# EAGLE board ss (EAGLE 6.1)
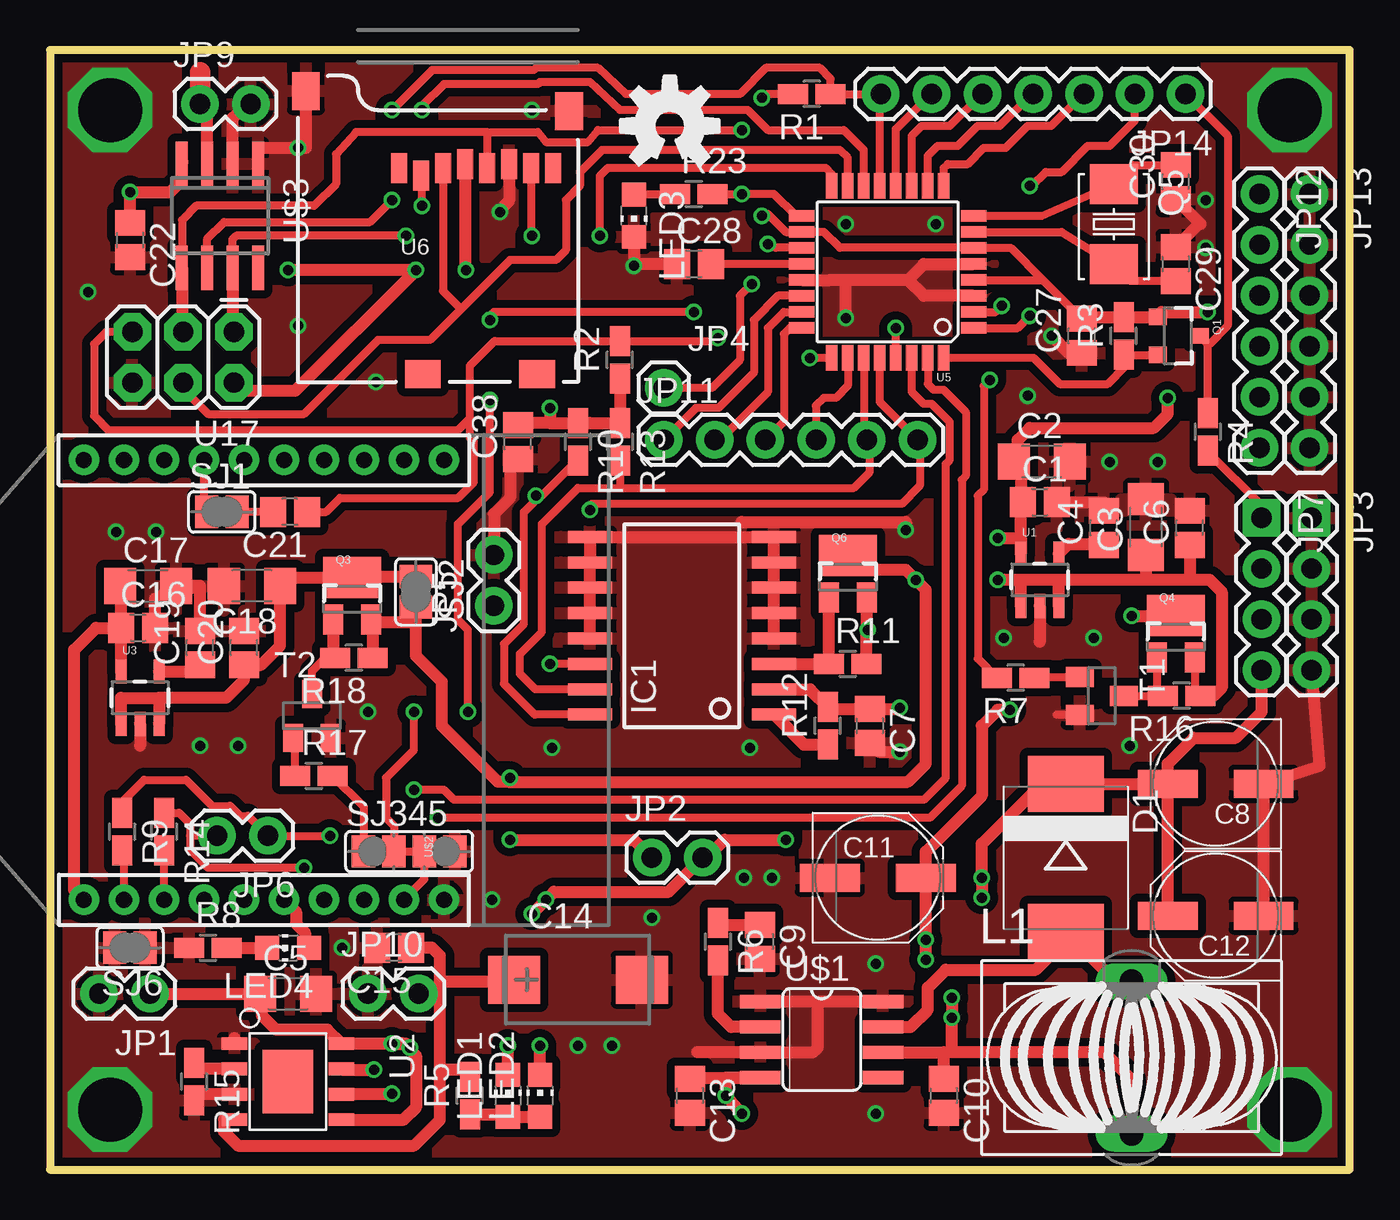
[diagram p0: board, top side]
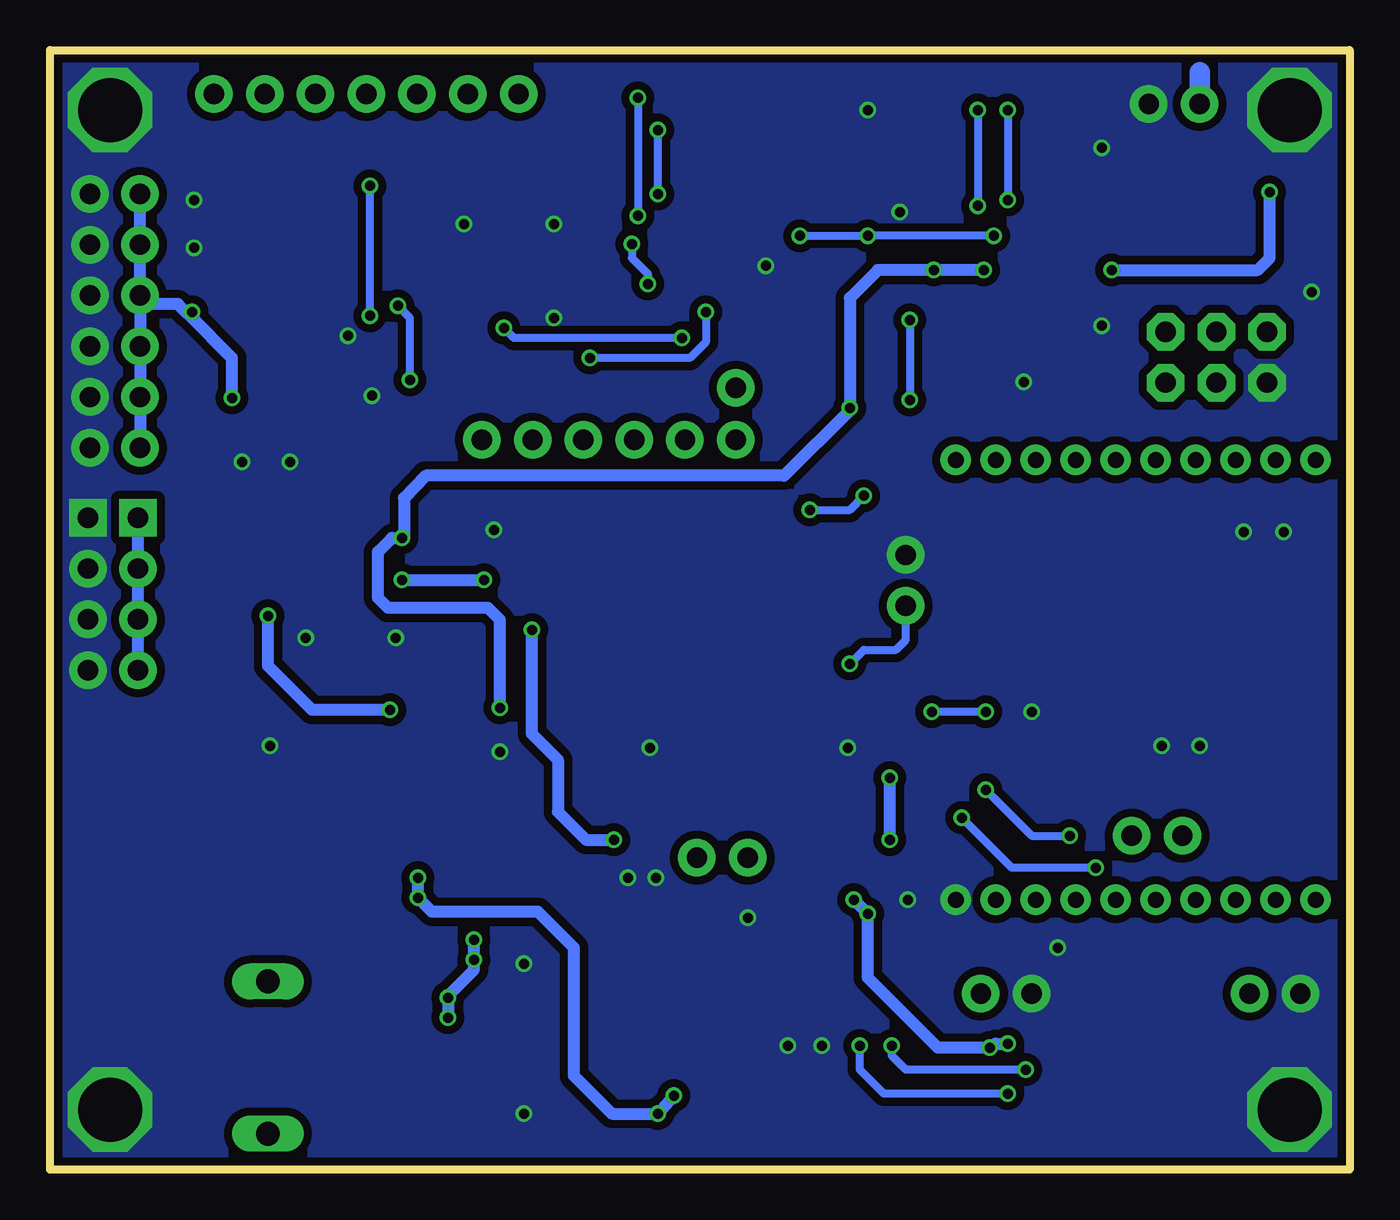
[diagram p1: board, bottom side, seen from below]

Size 65 x 56 mm. Coordinates in mm from the lower left corner, seen from the top.
Outline: 0,0 65,0 65,56 0,56 0,0
Copper layers (1*16): Top 0.035mm / dielectric 1.5mm / Bottom 0.035mm
Design rules: minimum track width 6mil, minimum drill 12mil, track to track 6mil, track to pad 6mil, pad to pad 6mil, via to via 6mil, smd to smd 0mil, copper to edge 10mil, drill to drill 10mil, minimum pad ring 10mil, minimum via ring 6mil, stop-mask expansion 2mil, vias tented up to drill 100mil, thermal gap 10mil
Net classes: 1 vcc: width 0.203 mm

## Footprints (pad centres in the part's own frame; a part is rotated, then mirrored left to right if it is on the bottom)
C0805 = smd 1.3 x 1.5: 1 -0.85,0; 2 0.85,0
C1206 = smd 1.6 x 1.8: 1 -1.4,0; 2 1.4,0
PANASONIC_D = smd 3 x 1.4: + 2.4,0; - -2.4,0
CT7343 = smd 2.6 x 2.4: + -3.2,0; - 3.2,0
SMC = smd 2.8 x 3.8: A 3.7,0; C -3.7,0
SO-16 = smd 0.6 x 2.2: 1 -4.445,-4.6; 2 -3.175,-4.6; 3 -1.905,-4.6; 4 -0.635,-4.6; 5 0.635,-4.6; 6 1.905,-4.6; 7 3.175,-4.6; 8 4.445,-4.6; 9 4.445,4.6; 10 3.175,4.6; 11 1.905,4.6; 12 0.635,4.6; 13 -0.635,4.6; 14 -1.905,4.6; 15 -3.175,4.6; 16 -4.445,4.6
1X02 = drill 1.016 pad 1.88: 1 0,0; 2 2.54,0
1X04 = drill 1.016 pad 1.88 square: 1 0,0 | drill 1.016 pad 1.88: 2 2.54,0; 3 5.08,0; 4 7.62,0
1X01 = drill 1.016 pad 1.88: 1 0,0
1X06 = drill 1.016 pad 1.88: 1 0,0; 2 2.54,0; 3 5.08,0; 4 7.62,0; 5 10.16,0; 6 12.7,0
1X07 = drill 1.016 pad 1.88: 1 0,0; 2 2.54,0; 3 5.08,0; 4 7.62,0; 5 10.16,0; 6 12.7,0; 7 15.24,0
A26GFC = drill 1.194 long: 1 0,3.81; 2 0,-3.81
CHIP-LED0805 = smd 1.2 x 1.2: A 0,-1.05; C 0,1.05
SOT23-3 = smd 0.8 x 0.9: 1 -0.95,-1; 2 0.95,-1; 3 0,1.1
SOT23-3_POWER = smd 1 x 1.5: 1 -0.939,-1.384; 2 0.961,-1.384 | smd 2.9 x 2.05: 3 0.011,0.716
CRYSTAL_5X3.2 = smd 2 x 2.4: P$1 -2,0; P$2 2,0
R0805W = smd 1.5 x 1: 1 -0.94,0; 2 0.94,0
SJ = smd 1.168 x 1.6: 1 -0.762,0; 2 0.762,0
SJ_4P = smd 1.168 x 1.6: 1 0.583,0.803; 2 2.107,0.803; 3 3.631,0.803; 4 5.155,0.803
SOT23 = smd 1 x 1.4: 1 -0.95,-1.1; 2 0.95,-1.1; 3 0,1.1
SOT23-5 = smd 0.55 x 1.2: 1 -0.95,-1.3; 2 0,-1.3; 3 0.95,-1.3; 4 0.95,1.3; 5 -0.95,1.3
SOP8-W/-HEAT = smd 0.635 x 1.27: 1 -1.905,-2.667; 2 -0.635,-2.667; 3 0.635,-2.667; 4 1.905,-2.667; 5 1.905,2.667; 6 0.635,2.667; 7 -0.635,2.667; 8 -1.905,2.667 | smd 3.175 x 2.54: HEAT 0,0
TQFP32-08 = smd 1.27 x 0.559: 1 -4.293,2.8; 2 -4.293,2; 3 -4.293,1.2; 4 -4.293,0.4; 5 -4.293,-0.4; 6 -4.293,-1.2; 7 -4.293,-2; 8 -4.293,-2.8; 17 4.293,-2.8; 18 4.293,-2; 19 4.293,-1.2; 20 4.293,-0.4; 21 4.293,0.4; 22 4.293,1.2; 23 4.293,2; 24 4.293,2.8 | smd 0.559 x 1.27: 9 -2.8,-4.293; 10 -2,-4.293; 11 -1.2,-4.293; 12 -0.4,-4.293; 13 0.4,-4.293; 14 1.2,-4.293; 15 2,-4.293; 16 2.8,-4.293; 25 2.8,4.293; 26 2,4.293; 27 1.2,4.293; 28 0.4,4.293; 29 -0.4,4.293; 30 -1.2,4.293; 31 -2,4.293; 32 -2.8,4.293
MICRO-SD-SOCKET-PP = smd 0.8 x 1.5: 1 -8.94,10.7; 2 -7.84,10.3; 3 -6.74,10.7; 4 -5.64,10.9; 5 -4.54,10.7; 6 -3.44,10.9; 7 -2.34,10.7; 8 -1.24,10.7 | smd 1.8 x 1.4: CD1 -2.05,0.4; CD2 -7.75,0.4 | smd 1.4 x 1.9: GND1 -13.6,14.55; GND3 -0.45,13.55
2X3 = drill 1.016 pad 1.88 octagon: 1 0,0; 2 0,2.54; 3 2.54,0; 4 2.54,2.54; 5 5.08,0; 6 5.08,2.54
SO08 = smd 0.66 x 2.032: 1 -1.905,-3.073; 2 -0.635,-3.073; 3 0.635,-3.073; 4 1.905,-3.073; 5 1.905,3.073; 6 0.635,3.073; 7 -0.635,3.073; 8 -1.905,3.073
XBEE-1 = drill 0.8 pad 1.524: 1 -11,20; 2 -11,18; 3 -11,16; 4 -11,14; 5 -11,12; 6 -11,10; 7 -11,8; 8 -11,6; 9 -11,4; 10 -11,2; 11 11,2; 12 11,4; 13 11,6; 14 11,8; 15 11,10; 16 11,12; 17 11,14; 18 11,16; 19 11,18; 20 11,20
SO08-MAX6675 = smd 0.6 x 2.2: 1 -1.905,-2.6; 2 -0.635,-2.6; 3 0.635,-2.6; 4 1.905,-2.6; 5 1.905,2.6; 6 0.635,2.6; 7 -0.635,2.6; 8 -1.905,2.6

## Placement (x,y rotation side)
C1  100nF  [C0805]  49.5,33.38 0 top
C2  10uF  [C1206]  49.6,35.42 0 top
C3  10uF  [C1206]  54.82,32.13 90 top
C4  1uF  [C0805]  52.7,32.1 90 top
C5  10uF  [C1206]  11.9,8.8 0 top
C6  100nF  [C0805]  57,32.1 90 top
C7  100nF  [C0805]  41,22.2 270 top
C8  220uF  [PANASONIC_D]  58.3,19.3 180 top
C9  100nF  [C0805]  35.5,11.4 270 top
C10  100nF  [C0805]  44.7,3.7 270 top
C11  220uF  [PANASONIC_D]  41.4,14.6 0 top
C12  220uF  [PANASONIC_D]  58.3,12.7 180 top
C13  100pF  [C0805]  32,3.7 270 top
C14  47uF  [CT7343]  26.4,9.5 0 top
C15  100nF  [C0805]  17.2,11.1 180 top
C16  100nF  [C0805]  4.4,27.1 0 top
C17  10uF  [C1206]  4.9,29.2 0 top
C18  10uF  [C1206]  10.1,29.2 180 top
C19  1uF  [C0805]  7.5,26.1 90 top
C20  100nF  [C0805]  9.7,26.1 90 top
C21  100nF  [C0805]  12,32.9 180 top
C22  100nF  [C0805]  4,46.5 270 top
C27  100nF  [C0805]  51.6,41.7 90 top
C28  100nF  [C0805]  32.2,45.3 0 top
C29  22p  [C0805]  56.3,45.3 270 top
C30  22p  [C0805]  56.3,49.4 90 top
C38  100nF  [C0805]  23.4,36.4 90 top
D1  SL44  [SMC]  50.8,15.6 270 top
IC1  DS3231  [SO-16]  31.6,27.2 90 top
JP1  bat  [1X02]  5,8.8 180 top
JP2  sw1  [1X02]  30.1,15.6 0 top
JP3  gnd  [1X04]  63.1,32.6 270 top
JP4  a6  [1X01]  30.7,39.1 0 top
JP5  3v Li bat  [1X02]  22.2,28.2 90 top
JP6  rxtx  [1X02]  10.9,16.7 180 top
JP7  5v  [1X04]  60.6,32.6 270 top
JP9  Kterm  [1X02]  7.5,53.3 0 top
JP10  power  [1X02]  15.9,8.8 0 top
JP11  analog  [1X06]  30.7,36.5 0 top
JP12  3v3  [1X06]  60.5,48.8 270 top
JP13  gnd  [1X06]  63,48.8 270 top
JP14  digital  [1X07]  56.8,53.8 180 top
L1  A26GFC  [A26GFC]  54.1,5.6 0 top
LED1  charging  [CHIP-LED0805]  22.9,3.7 0 top
LED2  full  [CHIP-LED0805]  24.5,3.7 0 top
LED3  green  [CHIP-LED0805]  29.2,47.7 180 top
LED4  green  [CHIP-LED0805]  11.9,11.1 90 top
Q1  BSS138  [SOT23-3]  56.4,41.7 270 top
Q3  si2305cd  [SOT23-3_POWER]  15.1,28.9 0 top
Q4  si2305cd  [SOT23-3_POWER]  56.3,27 0 top
Q5  8MHz  [CRYSTAL_5X3.2]  53.2,47.3 270 top
Q6  si2305cd  [SOT23-3_POWER]  39.9,30 0 top
R1  100K  [R0805W]  38.1,53.8 180 top
R2  10K  [R0805W]  28.5,40.5 90 top
R3  10k  [R0805W]  53.7,41.7 90 top
R4  10k  [R0805W]  57.9,36.9 270 top
R5  1K  [R0805W]  21,3.7 90 top
R6  4.7K  [R0805W]  33.4,11.4 270 top
R7  1M  [R0805W]  48.3,24.6 180 top
R8  2k  [R0805W]  7.9,11.1 0 top
R9  4.7k  [R0805W]  3.6,16.9 270 top
R10  4.7k  [R0805W]  26.4,36.4 270 top
R11  100k  [R0805W]  39.9,25.3 0 top
R12  10k  [R0805W]  38.9,22.2 90 top
R13  4.7k  [R0805W]  28.5,36.4 270 top
R14  4.7k  [R0805W]  5.7,16.9 270 top
R15  3.9k  [R0805W]  7.2,4.4 270 top
R16  100k  [R0805W]  56.6,23.7 180 top
R17  1M  [R0805W]  13.2,19.7 0 top
R18  100k  [R0805W]  15.2,25.6 180 top
R23  1K  [R0805W]  32.2,48.8 0 top
SJ1  J1  [SJ]  8.6,32.9 0 top
SJ2  J2  [SJ]  18.3,28.9 270 top
SJ6  J6  [SJ]  4,11.1 180 top
SJ345  J345  [SJ_4P]  15.1,15.1 0 top
T1  BC846  [SOT23]  52.6,23.7 270 top
T2  BC846  [SOT23]  13.1,22.7 0 top
U1  SPX5205 3v3  [SOT23-5]  49.5,29.5 0 top
U2  CN3083  [SOP8-W/-HEAT]  11.9,4.4 270 top
U3  SPX5205 3v3  [SOT23-5]  4.5,23.6 0 top
U5  ATMEGA328  [TQFP32-08]  41.9,44.9 180 top
U6  microSD Socket  [MICRO-SD-SOCKET-PP]  26.4,39.4 0 top
U17  AVR_SPI_PRG_6PTH  [2X3]  9.2,41.9 180 top
U$1  LT1302SOIC8  [SO08]  38.6,6.5 270 top
U$2  XBEE-1B1  [XBEE-1]  21.7,24.5 90 top
U$3  MAX6675  [SO08-MAX6675]  8.5,47.7 180 top
U$7  OSHW-LOGOM  [OSHW-LOGO-M]  31,52.2 0 top

## Library data of the parts
C1-C7 C9 C10 C13-C22 C27-C30 C38 R1-R18 R23 = rcl
C8 C11 C12 JP1-JP3 JP5-JP7 JP9-JP13 Q1 U1 U3 U5 U6 U17 U$2 U$7 = SparkFun
D1 = diode
IC1 = ds3231
JP4 JP14 = SparkFun-Connectors
L1 = inductors
LED1-LED4 = led
Q3 Q4 Q6 = Simplex-DiscreteSemi
Q5 = Omat_komponentit
SJ1 SJ2 SJ6 = jumper
SJ345 = Simplex-Jumpers
T1 T2 = transistor
U2 = IC
U$1 = mine
U$3 = SparkFun-AnalogIC

## Nets
+3V3: C1.1 C2.1 C7.1 C22.1 C27.2 C38.2 IC1.2 JP12.1 JP12.2 JP12.3 JP12.4 JP12.5 JP12.6 Q1.1 R1.2 R2.1 R3.2 R10.1 R12.2 R13.1 U1.5 U5.4 U5.6 U5.18 U6.4 U17.2 U$3.4
+3V3_XBEE: C16.1 C17.1 U3.5 U$2.1
+5V: C8.+ C12.+ C13.1 D1.C JP7.1 JP7.2 JP7.3 JP7.4 R4.2 U$1.4
A0: JP11.2 U5.23
A1: JP11.3 U5.24
A3: JP11.4 U5.26
A6: JP4.1 U5.19
A7: JP11.1 U5.22
BOOST_IN: C10.1 C11.+ L1.2 Q4.3 U$1.6
BOOST_SW: R7.2 U5.2
CS: U5.14 U6.2
D3: JP14.2 U5.1
D5: JP14.3 U5.9
D6: JP14.4 U5.10
D7: JP14.5 U5.11
D8: JP14.6 U5.12
D9: JP14.7 R1.1 U5.13 U$3.6
GND: C1.2 C2.2 C3.2 C4.2 C5.2 C6.2 C7.2 C8.- C9.2 C10.2 C11.- C12.- C13.2 C14.- C15.2 C16.2 C17.2 C18.2 C19.2 C20.2 C22.2 C27.1 C28.1 C29.1 C30.1 C38.1 IC1.4 IC1.5 IC1.6 IC1.7 IC1.8 IC1.9 IC1.10 IC1.11 IC1.12 IC1.13 JP1.2 JP3.1 JP3.2 JP3.3 JP3.4 JP5.2 JP9.2 JP10.1 JP13.1 JP13.2 JP13.3 JP13.4 JP13.5 JP13.6 LED3.C R8.1 R15.2 SJ6.1 SJ6.2 SJ345.4 T1.2 T2.2 U1.2 U2.1 U2.3 U3.2 U5.3 U5.5 U5.21 U6.6 U6.GND1 U6.GND3 U17.6 U$1.1 U$1.3 U$1.8 U$2.10 U$3.1 U$3.2
H1: JP14.1 Q1.3 R4.1
L1: Q1.2 R3.1 U5.32
MISO: U5.16 U6.7 U17.1 U$3.7
MOSI: U5.15 U6.3 U17.4
N$1: IC1.3 Q6.1 R11.1
N$2: C4.1 U1.4
N$3: D1.A L1.1 U$1.7
N$4: SJ1.1 U$2.17
N$5: C19.1 U3.4
N$6: LED4.C R8.2
N$7: LED4.A U$2.6
N$8: IC1.1 R12.1
N$9: R15.1 U2.2
N$10: IC1.14 JP5.1
N$11: R6.2 U$1.2
N$12: C14.+ C15.1 JP10.2 R5.2 U2.4
N$13: C9.1 R6.1
N$14: LED1.A LED2.A R5.1
N$15: LED1.C U2.7
N$16: LED2.C U2.6
N$17: C21.2 SJ1.2
N$18: R17.1 T2.1
N$19: C30.2 Q5.P$1 U5.8
N$20: Q3.1 R18.2 T2.3
N$21: C29.2 Q5.P$2 U5.7
N$22: C28.2 U5.20
N$24: R9.2 U$2.2
N$25: R14.2 U$2.3
N$26: R7.1 T1.1
N$27: Q4.1 R16.2 T1.3
N$34: LED3.A R23.1
PD: U2.HEAT
RST: C21.1 R2.2 U5.29 U17.5
RXI: JP6.1 R9.1 U5.30
SCK: R23.2 U5.17 U6.5 U17.3 U$3.5
SCL: IC1.16 JP11.6 R10.2 U5.28
SDA: IC1.15 JP11.5 R13.2 U5.27
T+: JP9.1 U$3.3
TXO: JP6.2 R14.1 U5.31
V+: C5.1 JP1.1 JP2.2 Q6.2 R11.2 U2.5 U2.8
VIN: C3.1 C6.1 C18.1 C20.1 JP2.1 Q3.2 Q3.3 Q4.2 Q6.3 R16.1 R18.1 SJ2.1 SJ2.2 U1.1 U1.3 U3.1 U3.3
XBEE_HIB: SJ345.2 SJ345.3 U5.25 U$2.9
XBEE_PWR_SW_M: R17.2 SJ345.1

## Tracks (layer width: path | path; a pad name or v marks a point on that pad's centre or on a via)
+3V3  (via drill 0.5)
  Top 0.406: U5.4 49.65,44.5 | 49.65,44.5 C27.2 | 49.65,44.5 48.05,46.1 U5.6 39.5,46.1 38.7,46.9 U5.18 | U5.18 | v35.6,47.7 35.9,47.8 36.8,46.9 U5.18 | v35.6,53.6 35.9,53.8 R1.2
  Top 0.61: U17.2 9.61,38.95 12.25,38.95 v18.3,45 v11.9,45 | U6.4 20.76,45 v20.8,45 | IC1.2 38.02,24.02 R12.2 38.96,23.2 39.11,23.05 C7.1 42.5,23.05 v42.5,23.1 | R10.1 R13.1 R2.1 | 24.96,37.34 24.96,37.4 arc90 25,37.44 v25,38.1 | 23.55,37.4 C38.2 arc-90 23.49,37.34 24.96,37.34 | 24.96,37.34 R10.1 | C27.2 51.69,42.64 R3.2 55.34,42.64 55.4,42.7 | 48.55,33.28 U1.5 48.55,31.6 v47.4,31.6 | 48.55,33.28 arc-90 C1.1 48.4,33.63 | R10.1 27,37.34 | v55.9,38.6 55.9,37.8 55.2,37.1 49,37.1 48.4,36.5 48.4,35.42 | Q1.1 55.4,42.7 | C2.1 48.4,35.42 | 48.4,35.42 48.55,35.42 48.55,33.28 | C22.1 v4,48.9 6,48.9 6.6,49.5 U$3.4 | 6.6,50.5 U$3.4 | U$3.4 | 55.4,42.7 55.6,42.9 v57.9,42.9
  Bottom 0.406: v35.6,53.6 v35.6,47.7
  Bottom 0.61: v18.3,45 v20.8,45 23.6,45 25,43.6 v25,38.1 25,38 28.3,34.7 46.2,34.7 47.3,33.6 47.3,31.7 v47.4,31.6 47.9,31.6 48.6,30.9 48.6,28.6 48.1,28.1 43.1,28.1 42.5,27.5 v42.5,23.1 | v55.9,38.6 55.9,40.6 58,42.7 v57.9,42.9 58.1,42.8 58.6,43.3 60.5,43.3 | JP12.1 JP12.2 JP12.3 60.5,43.3 | JP12.6 JP12.5 JP12.4 60.5,43.3 | v11.9,45 4.6,45 4,45.6 v4,48.9
+3V3_XBEE
  Top 0.61: U3.5 C16.1 | C16.1 3.55,28.75 C17.1 | U$2.1 1.2,14 1.2,26 2.3,27.1 C16.1
+5V  (via drill 0.5)
  Top 0.406: R4.2 57.9,35.9 60.6,33.2 JP7.1
  Top 0.61: v46.6,13.6 v46.6,14.6 46.6,16.3 49.5,19.2 50.6,19.2 | v34.6,2.8 v33.8,3.7 33.8,4.59 U$1.4 35.1,4.59 35.1,4.6 32.05,4.6 C13.1 | C12.+ C8.+ | C8.+ 55.9,20.3 57.2,21.6 59.3,21.6 60.6,22.9 JP7.4 | C8.+ D1.C 50.7,19.3 50.6,19.2 | 50.6,19.2 50.9,19.2
  Bottom 0.61: JP7.1 JP7.2 JP7.3 JP7.4 | v46.6,14.6 v46.6,13.6 45.9,12.9 40.6,12.9 38.8,11.1 38.8,4.7 36.9,2.8 v34.6,2.8 v33.8,3.7
A0
  Top 0.406: U5.23 36.7,42.9 35.9,42.1 35.9,38.9 33.5,36.5 JP11.2
A1
  Top 0.406: U5.24 37,42.1 36.7,41.8 36.7,37.42 JP11.3 35.8,36.5
A3
  Top 0.406: U5.26 39.9,39.2 39.3,38.6 38.7,38.6 38.3,38.2 38.3,36.52 JP11.4
A6  (via drill 0.5)
  Top 0.406: U5.19 36.3,46.1 v35.9,46.3 | v35.1,44.3 34.5,43.7 34.5,40.5 33.1,39.1 JP4.1
  Bottom 0.406: v35.1,44.3 35.1,44.8 35.9,45.6 v35.9,46.3
A7
  Top 0.406: U5.22 36.4,43.7 35.2,42.5 35.2,39.86 33.44,38.1 32.3,38.1 JP11.1
BOOST_IN  (via drill 0.5)
  Top 0.61: v48,23 47.4,23 46.6,22.2 46.6,18.7 43.8,15.9 C11.+ v43.8,11.5 v43.8,10.5 | U$1.6 44.7,5.87 | 44.7,5.87 44.97,5.87 | v45.1,8.6 v45.1,7.6 45.1,6 44.97,5.87 | L1.2 54.1,4.5 52.73,5.87 44.97,5.87 | C10.1 44.7,5.87 | v54.1,27.7 56.3,27.7 Q4.3
  Bottom 0.61: v43.8,11.5 v43.8,10.5 43.8,10 45.1,8.7 v45.1,8.6 v45.1,7.6 | v48,23 51.9,23 54.1,25.2 v54.1,27.7
BOOST_SW  (via drill 0.5)
  Top 0.406: R7.2 46.4,25.56 46.4,33.7 46.7,34 46.7,39.2 v47,39.5 | U5.2 47.3,42.9 v47.6,43.2
  Bottom 0.406: v47,39.5 47,42.6 v47.6,43.2
CS  (via drill 0.5)
  Top 0.406: U5.14 40.7,51 39.7,52 35.9,52 34.9,53 28.5,53 27,54.4 24.5,54.4 24.4,54.3 19.7,54.3 18.6,53.2 v18.6,53 | 18.6,48.4 v18.6,48.2 18.6,49.96 U6.2
  Bottom 0.406: v18.6,53 v18.6,48.2
D3  (via drill 0.5)
  Top 0.406: U5.1 48.4,42.1 v49,42.7 | v49,49.2 49.1,49.2 49.8,49.9 50.6,49.9 51.9,51.2 53,51.2 54.26,52.46 JP14.2
  Bottom 0.406: v49,42.7 v49,49.2
D5
  Top 0.406: U5.9 44.7,50.1 44.9,50.3 45.9,50.3 46.7,51.1 47.8,51.1 48.9,52.2 50.08,52.2 51.68,53.8 JP14.3
D6
  Top 0.406: U5.10 43.9,50.7 44.4,51.2 45.4,51.2 46.4,52.2 47.5,52.2 49.1,53.8 JP14.4
D7
  Top 0.406: U5.11 43.1,51.7 43.6,52.2 45,52.2 46.6,53.8 JP14.5
D8
  Top 0.406: U5.12 42.3,52.04 44.06,53.8 JP14.6
D9  (via drill 0.5)
  Top 0.406: U$3.6 7.87,46.56 8.7,47.4 16,47.4 v17.1,48.5 | v17.1,53 19.1,55 24.2,55 24.3,55.1 27.4,55.1 28.8,53.8 34.5,53.8 35.8,55.1 38.5,55.1 39.04,54.56 R1.1 JP14.7 41.5,53.8 U5.13
  Bottom 0.406: v17.1,53 v17.1,48.5
GND  (via drill 0.5, 3.2)
  Top 0.406: 39.1,44.6 39,44.5 | T1.2 50.35,22.75
  Top 0.61: C16.2 5.25,28.55 C17.2 7.3,29.2 | C19.2 7.5,29.2 7.3,29.2 | U$3.1 10.4,51.1 v12.4,51.1 12.8,51.1 U6.GND1 | LED3.C v29.2,45.2 29.3,45.3 C28.1 | U5.21 39,44.5 39.8,44.5 | 42.9,44.5 43.7,45.3 U5.5 | U5.3 43.7,43.7 42.9,44.5 | IC1.4 IC1.5 IC1.6 IC1.7 IC1.8 IC1.9 IC1.10 IC1.11 IC1.12 IC1.13 | 22.66,48.06 v22.5,47.9 | 6.5,29.1 7.4,29.1 7.3,29.2 | U6.GND3 25.9,53.2 | C29.1 57.45,47.3 | C30.1 57.55,47.3 | C27.1 50.95,40.85 v50.1,41.7 | 42.9,44.5 39.8,44.5 | v39.8,42.6 39.8,44.5 | C4.2 52.32,33.38 | C7.2 41.45,20.9 v42.5,20.9 | U2.1 9.23,6.57 | 38.4,8.3 38.4,6.1 38.16,5.87 U$1.3 32.38,5.87 | 38.4,8.3 38.3,8.4 35.6,8.4 35.59,8.4 U$1.1 | 38.4,8.3 38.51,8.4 U$1.8 | JP3.4 63.5,20.2 C8.- C12.- | 12.8,54.2 12.8,54 | 34.6,32.4 42.8,32.4 v42.8,32 | C1.2 52.7,33.38 52.7,32.9 | U2.3 7.3,3.77 7.3,3.46 | R15.2 7.3,3.46 | 7.3,3.46 7.3,3.4 | U6.6 22.96,48.46 22.4,47.9 | C38.1 23,35.55 23,33.6 22.2,32.8 JP5.2 | U3.2 4.5,21.2 | U1.2 49.5,26.4 | U$3.2 9.13,52.59 9.84,53.3 JP9.2
  other vias: 24.1,53 1.9,43.9 44.3,47.3 39.8,47.3 7.5,21.2 15.9,22.9 57.8,46.1 53,35.4 52.2,26.6 12.4,42.2 16.3,39.4 14.6,11.1 30.1,12.6 54,21.2 22.1,13.5 41.3,2.8 36.1,14.6 41.3,10.3 3.3,31.9 3,53 62,53 26.4,6.2 25.1,21.1 57.8,48.5 48.9,38.7 35,21.1 55.4,35.4 3,3 62,3 47.7,26.6 9.4,21.2 5.3,31.9 28.1,6.2 34.7,14.6
  pour Bottom (isolate 0.406, no thermals): 0.4,55.6 64.6,55.6 64.6,0.4 0.3,0.4
  pour Top (isolate 0.406): 0.4,55.6 64.6,55.6 64.6,0.4 0.4,0.4
H1
  Top 0.406: R4.1 57.9,41.3 | 57.9,41.3 Q1.3 | 56.8,53.6 JP14.1 58.9,51.7 58.9,42.2 58,41.3 57.9,41.3
L1
  Top 0.406: U5.32 49.19,40.61 50.5,39.3 52.9,39.3 53.8,40.2 53.8,40.66 | 53.8,40.66 R3.1 | 53.8,40.66 53.89,40.75 Q1.2
MISO  (via drill 0.5)
  Top 0.406: U$3.7 9.13,46.53 9.3,46.7 v17.8,46.7 | U5.16 39.1,49.8 38.8,50.1 27.9,50.1 27.5,49.7 v27.5,46.7 | U6.7 24.06,46.74 v24.1,46.7
  Top 0.61: U$3.7 9.13,41.97 U17.1
  Bottom 0.406: v17.8,46.7 v24.1,46.7 v27.5,46.7
MOSI
  Top 0.406: U5.15 39.9,50.6 39.5,51 27.6,51 26.5,49.9 26.5,49.2 25.8,48.5 25.8,46 25.3,45.5 23,45.5 20.55,43.05 | 20.55,43.05 19,41.5 16.4,41.5 12.7,37.8 7.9,37.8 6.66,39.04 U17.4 | U6.3 19.66,43.94 20.55,43.05
N$1
  Top 0.61: IC1.3 R11.1 38.96,27.82 Q6.1
N$2
  Top 0.61: U1.4 50.94,31.29 52.7,31.29 C4.1
N$3
  Top 0.61: U$1.7 43.03,7.13 43.9,8 43.9,9.1 44.8,10 49.3,10 50.8,11.5 D1.A 53.29,9.41 L1.1
N$4
  Top 0.406: SJ1.1 7.7,32.9 U$2.17
N$5
  Top 0.61: U3.4 7.15,24.9 C19.1
N$6
  Top 0.61: R8.2 LED4.C
N$7
  Top 0.61: U$2.6 12.3,12.9 12.3,12.3 12.75,11.85 12.75,11.15 12.9,11 12.9,11.05 LED4.A
N$8
  Top 0.61: IC1.1 37.7,21.26 R12.1
N$9
  Top 0.61: U2.2 7.2,5.04 R15.1
N$10  (via drill 0.5)
  Top 0.406: IC1.14 v25,25.3
  Bottom 0.406: v25,25.3 24.3,26 22.7,26 22.2,26.5 JP5.1
N$11
  Top 0.61: U$1.2 34.06,7.13 33.4,7.8 R6.2
N$12
  Top 0.61: 19.5,5 19.5,2.5 18.2,1.2 9.4,1.2 8.7,1.9 8.7,2.5 U2.4 | R5.2 20.64,5 19.5,5 | C14.+ 23.1,9.4 19.5,9.4 | 19.5,5 19.5,8.8 | 19.5,8.8 19.5,9.4 | 19.5,9.4 19.5,10.7 19.1,11.1 C15.1 | JP10.2 19.5,8.8
N$13
  Top 0.61: R6.1 33.49,12.25 C9.1
N$14
  Top 0.61: R5.1 22.79,2.76 LED1.A LED2.A
N$15  (via drill 0.5)
  Top 0.61: v16.2,5 14.6,5 U2.7 | LED1.C v22.9,6.2
  Bottom 0.406: v16.2,5 22.2,5 22.9,5.7 v22.9,6.2
N$16  (via drill 0.5)
  Top 0.61: U2.6 14.6,3.8 v17.1,3.8 | LED2.C v24.5,6.2
  Bottom 0.406: v17.1,3.8 23.3,3.8 24.5,5 v24.5,6.2
N$17
  Top 0.406: C21.2 SJ1.2
N$18
  Top 0.406: R17.1 12.26,21.49 T2.1
N$19
  Top 0.406: U5.8 49.6,47.7 Q5.P$1 54.15,50.25 C30.2
N$20
  Top 0.406: T2.3 13.1,24.94 13.76,25.6 R18.2
  Top 0.61: Q3.1 14.16,25.7 arc90 R18.2
N$21
  Top 0.406: U5.7 50.6,46.9 Q5.P$2 54.05,44.45 C29.2
N$22
  Top 0.406: U5.20 C28.2
N$24
  Top 0.406: U$2.2 3.7,15.86 R9.2
N$25
  Top 0.406: U$2.3 R14.2
N$26
  Top 0.406: R7.1 49.29,24.65 T1.1
N$27
  Top 0.406: T1.3 R16.2 55.36,23.7 Q4.1
N$34
  Top 0.406: LED3.A 29.2,48.8 R23.1
RST  (via drill 0.5)
  Top 0.406: U17.5 2.8,41.9 2.2,41.3 2.2,37.7 2.9,37 20.4,37 21,37.6 | C21.1 13.8,32.9 14.5,33.6 20.4,33.6 21.2,34.4 21.2,36.4 21,36.6 21,37.6 | U5.29 v42.3,42.1 | 21,37.6 21,40.2 22.24,41.44 R2.2 33.44,41.44 v33.4,41.6
  Bottom 0.406: v33.4,41.6 41.8,41.6 v42.3,42.1
RXI  (via drill 0.5)
  Top 0.406: R9.1 3.6,18.4 4.7,19.5 6.8,19.5 8.1,18.2 9,18.2 9.5,17.7 9.9,17.7 JP6.1 v14,16.7 | U5.30 43.1,38.9 43.7,38.3 44.1,38.3 45,37.4 45,35.5 44.8,35.3 44.8,19.6 43.7,18.5 20.2,18.5 19.7,19 v18.2,19
  Bottom 0.406: v14,16.7 15.9,16.7 v18.2,19
SCK  (via drill 0.5)
  Top 0.406: U$3.5 6.6,47.5 7.3,48.2 13.2,48.2 14.3,49.3 14.3,50.8 15.3,51.9 21.86,51.9 | U5.17 37.3,47.7 36.2,48.8 v34.6,48.8 R23.2 | 21.86,51.9 U6.5 | 21.86,51.9 24.4,51.9 24.8,51.4 26.9,51.4 27.4,52 v34.6,52
  Top 0.61: U$3.5 6.6,41.96 U17.3
  Bottom 0.406: v34.6,48.8 v34.6,52
SCL  (via drill 0.5)
  Top 0.406: U5.28 41.5,38.4 JP11.6 43.5,36.4 43.5,34.2 42.6,33.3 27.1,33.3 27.1,33.1 v27,33 | IC1.16 24.25,22.75 22.7,24.3 22.7,26.3 23.7,27.3 23.7,32.9 24.3,33.5 v24.3,33.7 24.6,33.7 26.35,35.45 26.36,35.46 | 26.36,35.46 26.4,35.5 | R10.2 26.36,35.46
  Bottom 0.406: v27,33 25,33 v24.3,33.7
SDA
  Top 0.406: IC1.15 24.27,24.02 23.5,24.8 23.5,25.8 24.6,26.9 24.6,32.3 26.4,34.1 28.5,34.1 | 28.5,34.1 40.2,34.1 41,34.9 41,36.5 | R13.2 28.5,34.1 | U5.27 40.7,36.66 JP11.5 41,36.5 | 41,36.5 41,36.56
T+
  Top 0.406: 7.87,53.34 7.5,53.34 JP9.1
  Top 0.61: U$3.3 7.87,53.34 | JP9.1 7.6,53.3
  Top 1.016: JP9.1 7.5,54.9
  Bottom 1.016: 7.5,54.9 JP9.1
TXO  (via drill 0.5)
  Top 0.406: R14.1 6.46,17.84 7,17.3 7,16.7 | 7,16.7 7,16 7.9,15.1 v12.7,15.1 | U5.31 43.9,39.3 44.2,39 44.7,39 45.8,37.9 45.8,34.7 45.6,34.5 45.6,19.2 44,17.6 v19.4,17.6 | JP6.2 7,16.7
  Bottom 0.406: v12.7,15.1 16.9,15.1 v19.4,17.6
V+  (via drill 0.5)
  Top 0.61: v17.11,6.3 U2.8 13.87,7 11.3,7 10.6,7.7 10.6,8.7 C5.1 JP1.1 | U2.5 17.7,2.5 18.3,3.1 18.3,5.7 17.7,6.3 | R11.2 40.84,26.94 v40.9,27 40.86,27.04 Q6.2 | 17.7,6.3 v18,6.1 17.8,6.3 v17.1,6.3 v17.11,6.3 | v24.1,12.8 25.2,13.9 30.94,13.9 JP2.2 32.84,15.6 33.74,16.5 v36.8,16.5 | 17.7,6.3 v17.11,6.3
  Bottom 0.61: v40.9,27 40.9,21.8 39.6,20.5 39.6,17.9 38.2,16.5 v36.8,16.5 | v18,6.1 20.6,6.1 24.1,9.6 v24.1,12.8 v24.8,13.5 | 18,6 17.7,6.3 v17.1,6.3
VIN  (via drill 0.5)
  Top 0.406: Q4.2 57.26,23.7 R16.1 | 18,30 17.84,30 arc90 SJ2.1
  Top 0.61: Q6.3 39.99,30 42.8,30 v43.3,29.5 43.8,29 43.8,20.3 42.9,19.4 22.9,19.4 23,19.5 | U1.1 48.55,29.5 | 48.55,29.5 v47.4,29.5 | U1.3 50.45,29.5 | 50.45,29.5 48.55,29.5 | 57,29.5 58,29.5 58.6,28.9 58.6,24.1 58.2,23.7 R16.1 | 57,29.5 54.82,29.5 | 54.82,29.5 50.45,29.5 | C3.1 54.82,29.5 | C6.1 57,29.5 | v23,16.5 29.2,16.5 JP2.1 | v23,19.6 23,19.5 | 23,19.5 22.8,19.4 22.4,19.4 19.6,22.2 19.6,24.4 18.3,25.7 18.3,27.4 | R18.1 16.14,27.44 Q3.2 16.18,27.4 18.3,27.4 | 18.3,27.4 SJ2.2 SJ2.1 15.16,29.66 Q3.3 11.92,29.62 C18.1 11.5,26.2 10.55,25.25 C20.1 9.7,24.5 8.8,23.6 5.45,23.6 | U3.1 3.55,23.6 5.45,23.6 | 5.45,23.6 U3.3
  Bottom 0.61: v47.4,29.5 v43.3,29.5 | v23,16.5 v23,19.6
XBEE_HIB  (via drill 0.5)
  Top 0.406: U$2.9 18.73,14.53 SJ345.3 | v32.2,42.9 22.2,42.9 22,42.7 v22,42.5 | v22,38.5 22,33.9 20.4,32.3 20.4,27.5 20.9,27 v20.9,22.9 | v38.01,40.61 v38,40.6 U5.25 | SJ345.3 SJ345.2 17.21,17.19 16.8,17.6 16.8,19.6 18.2,21 v18.2,22.9 | SJ345.3 18.8,15.9
  Bottom 0.406: v22,42.5 v22,38.5 | v38,40.6 33,40.6 32.2,41.4 v32.2,42.9 | v18.2,22.9 v20.9,22.9
XBEE_PWR_SW_M
  Top 0.406: SJ345.1 arc90 15.7,15.92 15.7,18.14 R17.2

## Text on the board
tmine: t+ | t- | d9 | d8 | d7 | d6 | d5 | d3 | h1 | . | sck | D46971 | . | . | a6 | a7 | a0 | a1 | a3 | sda | scl | 3v3 | gnd | J1 | J2 | +3v | . | 5v | gnd | d1 | d0 | J3 4 5 | power sw | +5v | J6 | rssi | . | +3v7 | . | ch | ok | ss rev 03 Petre Rodan 201211